# Allegro board bridgePS.brd
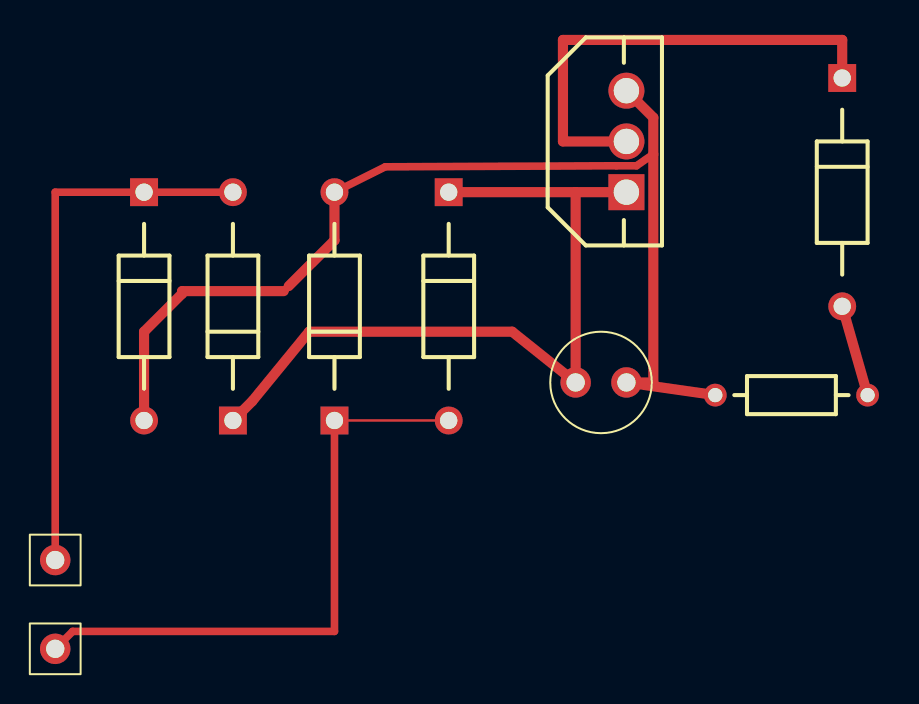
[diagram p0: board, top side]
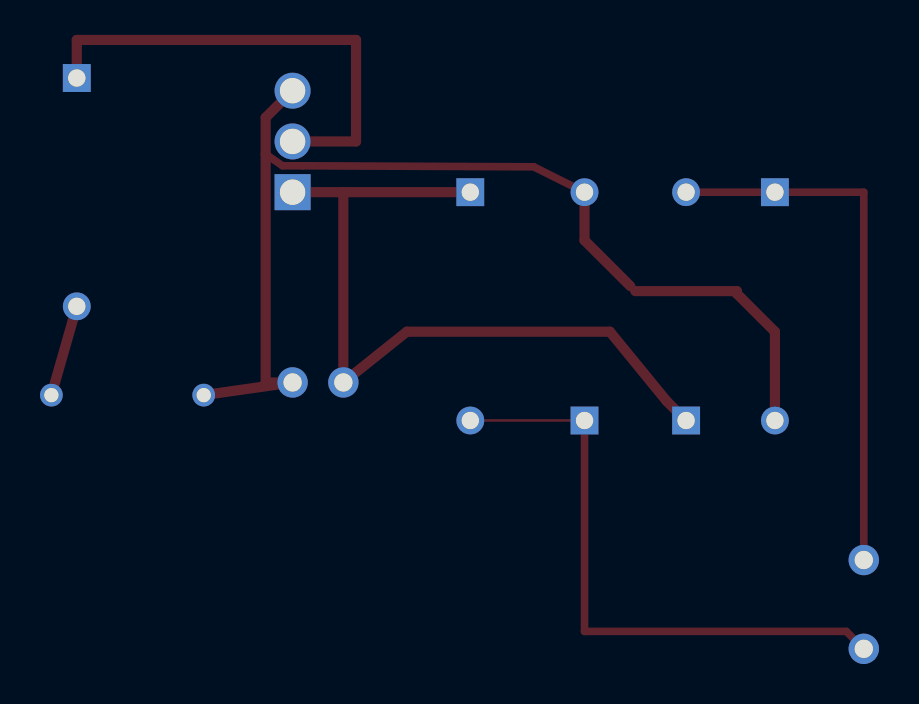
[diagram p1: board, bottom side, seen from below]

No outline. copper layers: TOP, BOTTOM. Coordinates in mm from the lowest, leftmost part position.

## Design rules (mm)
constraint set DEFAULT: min track width 0.127

## Placement (name value [footprint] x y rotation side)
C1  2200uf  [CAP196]  28.57 13.33 90 top
D1  D1N4148  [DAX2DO35]  4.44 11.43 270 top
D2  D1N4148  [DAX2DO35]  8.89 22.86 90 top
D3  D1N4148  [DAX2DO35]  13.97 22.86 90 top
D4  D1N4148  [DAX2DO35]  19.69 11.43 270 top
D5  MLED81  [DAX1DO35]  39.37 28.57 270 top
J1  CON1  [JUMPER1]  0 4.44 0 top
J2  CON1  [JUMPER1]  0 0 0 top
R1  1k  [AXRC05]  40.64 12.7 180 top
U1  LM7805C  [TO202AB]  28.57 22.86 90 top

## Library data of the parts
C1 = C: Tolerance: ***; User Part Number: ***
D1 = 1N4148
D2-D4 = D1N4148
D5 = MLED81
J1 J2 = CON1: User Part Number: ***
R1 = R
U1 = LM7805C

## Footprints (pads in the part's own frame, mm; a bottom-side part is the same pattern mirrored in y, then rotated)
AXRC05
  round 1.143 hole 0.711: 1(0,0) 2(7.62,0)
CAP196
  round 1.524 hole 0.914: 1(0,0) 2(0,2.54)
DAX1DO35
  rect 1.397x1.397 hole 0.864: 1(0,0)
  round 1.397 hole 0.864: 2(11.43,0)
DAX2DO35
  round 1.397 hole 0.864: 1(0,0)
  rect 1.397x1.397 hole 0.864: 2(-11.43,0)
JUMPER1
  round 1.524 hole 0.914: 1(0,0)
TO202AB
  rect 1.803x1.803 hole 1.27: 1(0,0)
  round 1.803 hole 1.27: 2(2.54,0) 3(5.08,0)

## Nets
0: C1.1 D1.1 D3.1 R1.2 U1.3
N00825: D1.2 D2.1 J1.1
N00913: C1.2 D2.2 D4.2 U1.1
N01015: D3.2 D4.1 J2.1
N01875: D5.1 U1.2(OUT)
N01910: D5.2(C) R1.1

## Routing (per net, layer and track width the routed paths; a pad name or vN(x,y) marks a point on that pad's centre or on a via; arc(x,y) is an arc through that point)
0: length 55.8
  TOP w0.381: 29.92,24.76 29.08,24.18 28.07,24.18 16.51,24.13 D3.1 ; 11.68,18.16 11.43,17.91
  TOP w0.508: D3.1 13.97,20.45 11.68,18.16 ; R1.2 C1.1 29.92,13.33 29.92,26.59 U1.3 ; D1.1 4.44,15.88 6.35,17.78 6.35,17.91 11.43,17.91
N00825: length 27.3
  TOP w0.381: J1.1 0,22.86 D1.2 D2.1
N00913: length 38.5
  TOP w0.508: D4.2 26.04,22.86 ; 26.04,22.86 26.04,13.33 22.86,15.88 12.7,15.88 9.86,12.4 D2.2 ; 26.04,22.86 U1.1
N01015: length 30.6
  TOP w0.127: D4.1 D3.2
  TOP w0.381: J2.1 0.87,0.87 13.97,0.87 D3.2
N01875: length 24.1
  TOP w0.508: D5.1 39.37,30.48 25.4,30.48 25.4,25.4 U1.2
N01910: length 4.6
  TOP w0.508: D5.2 R1.1
